# Altium PCB BauhallenUhr.PcbDoc (part 2 of 2)
Units mm, origin at the board's own origin, x right, y up, seen from the top; angles counter-clockwise.
Board outline 100.2 x 100.2 mm, 4 copper layers (Top Layer, Signal Layer 2, GND Layer 3, Bottom Layer), stack 1.54 mm thick; 107 components, 75 nets, 408 pads, 16 vias.
Unrouted connection lines stored in the file: 261.
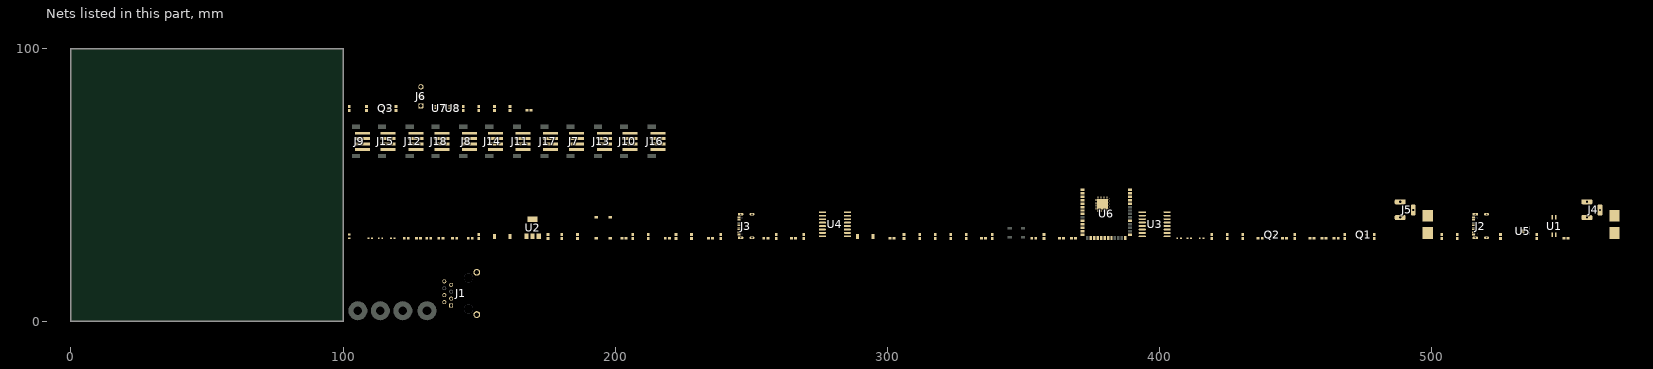
[diagram p2: the nets of this part, all layers, seen from the top]

## Part data
C1 C2 C3 C4 C5 C6 C7 C8 C9 C10 C11 C12 C13 C14 C15 C16 C17 C18 C19 C20 C21: library part Capacitor, "0603"
D1 D2 D3 D4 D5 D6: library part ESD_Protection_Diode, ComponentLink1Description=Supplier, ComponentLink1URL=https://www.digikey.com/en/products/detail/onsemi/ESD5B5-0ST1G/1792206
F1 F2: library part Fuse, "FUSE BRD MNT 10A 125VAC/VDC SMD"
J1: library part RJ45, "Jack Modular Connector 8p8c (RJ45, Ethernet) 90Â° Angle (Right) Shielded Cat3.", Package=None, Check_prices=https://www.snapeda.com/parts/RJE091884511C/Amphenol/view-part/?ref=eda, MF="Amphenol ICC (Commercial Products)", MP=RJE091884511C, SnapEDA_Link=https://www.snapeda.com/parts/RJE091884511C/Amphenol/view-part/?ref=snap
J2 J3: "USB - C - Port"
J4 J5: library part DC_PowerJack_THT, "DCPowerJack_THT_R/A_Plastic_CenterPin_ Ã˜2.0."
J6: library part Screw_Connector, "691214110003 Wurth Elektronik"
J7 J8 J9 J10 J11 J12 J13 J14 J15 J16 J17 J18: library part Connector_SMD, "CONN HEADER SMD 4POS 2MM.", ComponentLink1Description=Supplier, ComponentLink1URL=https://www.digikey.ch/en/products/detail/jst-sales-america-inc/B4B-PH-SM4-TB/926643
LED1: library part "LED_0603, GREEN", "LED 0603, Green, 3.2 V, 20 mA, 430 mcd"
MEC1 MEC2 MEC3 MEC4: "Mounting Hole for M3 Screw, plated to connect signal"
Q1 Q2: library part NPN_Bipolar_Transistor, "SS8050 SOT - 23.", ComponentLink1Description=Supplier, ComponentLink1URL=https://www.digikey.com/en/products/detail/guangdong-inmark-electronics-co-ltd/SS8050/28539054
Q3: library part PNP_Bipolar_Transistor, "Bipolar (BJT) Transistor PNP 25 V 500 mA 150MHz 300 mW Surface Mount SOT-23."
R1 R2 R3 R4 R5 R6 R7 R8 R9 R10 R11 R12 R13 R14 R15 R16 R17 R18 R19 R20 R21 R22 R23 R24 R25 R26 R27 R28 R29 R30 R31 R32 R33 R34 R35 R36 R37: library part Resistor, "0603"
S1 S2: library part Button
TP1 TP2 TP3 TP4: "Prüfstecker und Messbuchsen EZ BoardWare S27 SMT Mini Test Terminal, Reel"
U1: library part Optocoupler, "Optoisolator Transistor Output 3750Vrms 1 Channel 4-SO."
U2: "LDO, 3.3V and 800mA.", ComponentLink1Description=Datasheet, ComponentLink1URL=chrome-extension://efaidnbmnnnibpcajpcglclefindmkaj/https://www.st.com/content/ccc/resource/technical/document/datasheet/99/3b/7d/91/91/51/4b/be/CD00000544.pdf/files/CD00000544.pdf/jcr:content/translations/en.CD00000544.pdf, ComponentLink2Description=Supplier, ComponentLink2URL=https://www.digikey.ch/en/products/detail/stmicroelectronics/LD1117S33CTR/585765
U3 U4: library part USB_Digital_Isolator, "DGT ISOL 2500VRMS 2CH USB 16SOIC."
U5: "USB to UART bridge.", ComponentLink1Description=Datasheet, ComponentLink1URL=chrome-extension://efaidnbmnnnibpcajpcglclefindmkaj/https://www.silabs.com/documents/public/data-sheets/cp2102n-datasheet.pdf, ComponentLink2Description=Supplierlink, ComponentLink2URL=https://www.digikey.ch/en/products/detail/silicon-laboratories-inc/CP2102N-A02-GQFN28R/9863486?utm_source=findchips&utm_medium=aggregator&utm_campaign=buynow
U6: library part ESP32-S3-WROOM-2-N32R16V, "Bluetooth, WiFi 802.11b/g/n, Bluetooth v5.0 Transceiver Module 2.4GHz PCB Trace Surface Mount", Manufacturer="Espressif Systems", Supplier 1 Part Number=1965-ESP32-S3-WROOM-2-N32R16VCT-ND, Supplier 2 Part Number=356-SP32S3WM2N32R16V, Assembly Technology=SMD, ComponentLink1Description="Show Datasheet on SMS Drive", ComponentLink1URL="P:\Electronic Workshop\Datasheets (Refered in Libraries - Don't Change!)\ESP32-S3-WROOM-2-N32R16V_Digikey_1965-ESP32-S3-WROOM-2-N32R16VCT-ND.pdf", Latest Revision Date=17.10.2025, Latest Revision Made By="Simon Gimple", Latest Revision Note="New Part", Manufacturer Part Number=ESP32-S3-WROOM-2-N32R16V, Supplier 1=DigiKey, Supplier 2=Mouser
U7: library part Single_Bus_Buffer_Gate, "Single Bus Buffer Gate With 3-State Outputs, DBV0005A, LARGE T&R.", ComponentLink1Description=Supplier, ComponentLink1URL=https://www.digikey.com/en/products/detail/texas-instruments/SN74LVC1G126DBVR/385722
U8: library part Single_Bus_Buffer_Gate_Inverted, "Single Bus Buffer Gate With 3-State Outputs, DBV0005A, LARGE T&R.", ComponentLink1Description=Supplier

## Via types
v1: diameter 0.7, hole 0.3, Top Layer to Bottom Layer, tented top, 16 vias

## Nets (pads, with @x,y where several pads share a name; then routed paths per layer and width w, separated by ;. In a path a pad name is that pad's centre, name@x,y a point inside that pad or via, vN(x,y) a via of type N, cw(c..) or ccw(c..) an arc to the next point about the centre after c; other vN are vias at no path point)
+3.3V: C9.1 C10.1 C12.2 C13.2 C14.2 C15.2 C16.2 C20.2 C21.2 J1.1 J1.2 Q3.2 R15.2 R22.2 R24.2 R29.2 R35.2 R36.2 R37.2 U3.12 U3.13 U3.14 U3.16 U4.12 U4.13 U4.14 U4.16 U5.6 U5.7 U6.2 U7.5 U8.5
+5V: F2.2 J7.2 J8.2 J9.2 J10.2 J11.2 J12.2 J13.2 J14.2 J15.2 J16.2 J17.2 J18.2 R6.1 R13.2 TP1.1 U1.4
+12V: F1.2 J6.2
D1: J7.3 U6.39
D2: J13.3 U6.38
D3: J10.3 U6.4
D4: J16.3 U6.5
D5: J8.3 U6.6
D6: J14.3 U6.7
D7: J11.3 U6.18
D8: J17.3 U6.19
D9: J9.3 U6.20
D10: J15.3 U6.21
D11: J12.3 U6.22
D12: J18.3 U6.8
DATA: J6.3 R36.1 U7.4 U8.2
DTR: Q2.2 R25.2 U5.28
EN: C17.2 C18.2 R24.1 R27.2 S1.2 U6.3
GND: C3.2 C4.1 C7.1 C8.1 C9.2 C10.2 C11.1 C12.1 C13.1 C14.1 C15.1 C16.1 C17.1 C18.1 C19.1 C20.1 C21.1 J1.7 J1.8 J1.SH1 J1.SH2 J4.2 J4.3 J5.2 J5.3 J6.1 J7.1 J7.4 J8.1 J8.4 J9.1 J9.4 J10.1 J10.4 J11.1 J11.4 J12.1 J12.4 J13.1 J13.4 J14.1 J14.4 J15.1 J15.4 J16.1 J16.4 J17.1 J17.4 J18.1 J18.4 LED1.K R8.1 R23.1 R30.2 R31.2 R34.1 S1.1 S2.1 TP3.1 TP4.1 U2.1 U3.9 U3.15 U4.9 U4.15 U5.3 U5.29 U6.1 U6.40 U6.41 U7.3 U8.3
  other v1: 377.384,40.47 378.468,40.47 379.552,40.47 380.636,40.47 376.527,41.345 381.452,41.446 376.527,42.407 381.452,42.508 376.527,43.469 381.452,43.57 376.527,44.531 381.452,44.632 377.368,45.395 378.452,45.395 379.536,45.395 380.652,45.395
GND_A: C1.1 C5.2 D1.A D3.A D5.A J2.A1_B12 J2.B1_A12 J2.SH1 J2.SH2 J2.SH3 J2.SH4 R1.2 R2.2 U1.2 U3.2 U3.8
GND_B: C2.1 C6.2 D2.A D4.A D6.A J3.A1_B12 J3.B1_A12 J3.SH1 J3.SH2 J3.SH3 J3.SH4 R3.2 R4.2 U4.2 U4.8
GPIO0: C19.2 R28.2 R29.1 S2.2 U6.27
GPIO19: D4.K J3.A7 J3.B7 R11.1
GPIO19_2: R19.2 U6.13
GPIO20: D6.K J3.A6 J3.B6 R12.1
GPIO20_2: R20.2 U6.14
NetC3_1: C3.1 R7.1 R8.2 U5.8
NetC4_2: C4.2 C7.2 R6.2 U2.3
NetC5_1: C5.1 U3.3 U3.4 U3.5
NetC6_1: C6.1 U4.3 U4.4 U4.5
NetC8_2: C8.2 C11.2 R21.2 R22.1 TP2.1 U2.2 U2.4
NetD7_4-DIN: U6.31
NetF1_1: F1.1 J4.1
NetF2_1: F2.1 J5.1
NetJ2_A5: J2.A5 R2.1
NetJ2_B5: J2.B5 R1.1
NetJ3_A5: J3.A5 R4.1
NetJ3_B5: J3.B5 R3.1
NetLED1_A: LED1.A R21.1
NetQ1_1: Q1.1 R25.1
NetQ1_3: Q1.3 R27.1
NetQ2_1: Q2.1 R26.1
NetQ2_3: Q2.3 R28.1
NetQ3_1: Q3.1 R32.1
NetR5_1: R5.1 U1.1
NetR7_2: R7.2 R13.1 U1.3
NetR9_2: R9.2 U3.6
NetR10_2: R10.2 U3.7
NetR11_2: R11.2 U4.6
NetR12_2: R12.2 U4.7
NetR14_2: R14.2 U5.25
NetR15_1: R15.1 U5.9
NetR16_2: R16.2 U5.26
NetR17_1: R17.1 U3.11
NetR18_1: R18.1 U3.10
NetR19_1: R19.1 U4.11
NetR20_1: R20.1 U4.10
NetR23_2: R23.2 U5.11
NetR30_1: R30.1 U6.26
NetR31_1: R31.1 U6.16
NetR33_1: R33.1 R34.2
RTS: Q1.2 R26.2 U5.24
SCL: J1.4 U6.17
SDA: J1.3 U6.12
TX_EN: Q3.3 R33.2 U7.1 U8.1
U0_RXD: R14.1 U6.36
U0_TXD: R16.1 U6.37
U1_RXD: R37.1 U6.11 U8.4
U1_TXD: R32.2 R35.1 U6.10 U7.2
USB_DN: D3.K J2.A7 J2.B7 R9.1
USB_DN_2: R17.2 U5.5
USB_DP: D5.K J2.A6 J2.B6 R10.1
USB_DP_2: R18.2 U5.4
VBUS_A: C1.2 D1.K J2.A4_B9 J2.B4_A9 R5.2 U3.1
VBUS_B: C2.2 D2.K J3.A4_B9 J3.B4_A9 U4.1
pads on no net: D7.1 D7.2 D7.3 D7.4 J1. J1.5 J1.6 J2. J2.A8 J2.B8 J3. J3.A8 J3.B8 J7.SH1 J7.SH2 J8.SH1 J8.SH2 J9.SH1 J9.SH2 J10.SH1 J10.SH2 J11.SH1 J11.SH2 J12.SH1 J12.SH2 J13.SH1 J13.SH2 J14.SH1 J14.SH2 J15.SH1 J15.SH2 J16.SH1 J16.SH2 J17.SH1 J17.SH2 J18.SH1 J18.SH2 MEC1.1 MEC2.1 MEC3.1 MEC4.1 U5.1 U5.2 U5.10 U5.12 U5.13 U5.14 U5.15 U5.16 U5.17 U5.18 U5.19 U5.20 U5.21 U5.22 U5.23 U5.27 U6.9 U6.15 U6.23 U6.24 U6.25 U6.28 U6.29 U6.30 U6.32 U6.33 U6.34 U6.35

## Polygon pours and split planes (outlines as drawn)
GND on Top Layer "GND_L01_P000" (solid, pour order 0): 66.993,87.63 89.853,87.63 89.853,77.47 67.628,77.47 67.628,86.995

## Keep-outs
Top Layer:
  rectangle: 73.66,81.915 80.01,84.455
Keep-Out Layer:
  lines w0.013: 0,0 100,0 100,100 0,100 0,0

## Other copper
Top Layer:
  text "TOP (Normal Size)" at 21,-12 h1
  text "TOP (Small Size)" at 28,-18 h0.7
  text "SMS-2025.9" at 10.9,-21.5 h1
  text "SMS-2017.11 (0.7 MM IST MIN. TEXTHOEHE)" at 28,-21.5 h0.7
  text "TOP" at 10.9,-25 h1
Bottom Layer:
  text "BOT (Normal Size)" at 37,-14 h1
  text "BOT (Small Size)" at 38,-19 h0.7
  text "BOT" at 12.637,-24.819 h1

## Silkscreen, mask and mechanical layers (free items; w line width, h text height)
Top Solder:
  text "SMS-2025.9" at 10.9,-21.5 h1
  text "SMS LAB - SOMNOMAT V5" at 27.7,-23.8 h1

## Dimensions
0,0 to 100,0 on Mechanical 1
100,0 to 100,100 on Mechanical 1

## Text inside footprints (layer, text, board x,y; h text height)
J1: Mechanical 13 "PCB Edge" at 150.151,19.668 h0.81 r90
J2: Mechanical 13 "PCB EDGE" at 522.575,40.335 h0.41 r90
J3: Mechanical 13 "PCB EDGE" at 252.7,40.335 h0.41 r90